# Altium PCB Drvenkar_Dario.PcbDoc
Units mm, origin at the board's own origin, x right, y up, seen from the top; angles counter-clockwise.
Board outline 130 x 90 mm, 2 copper layers (Top Layer, Bottom Layer); 49 components, 38 nets, 178 pads, 0 vias.
Unrouted connection lines stored in the file: 5.
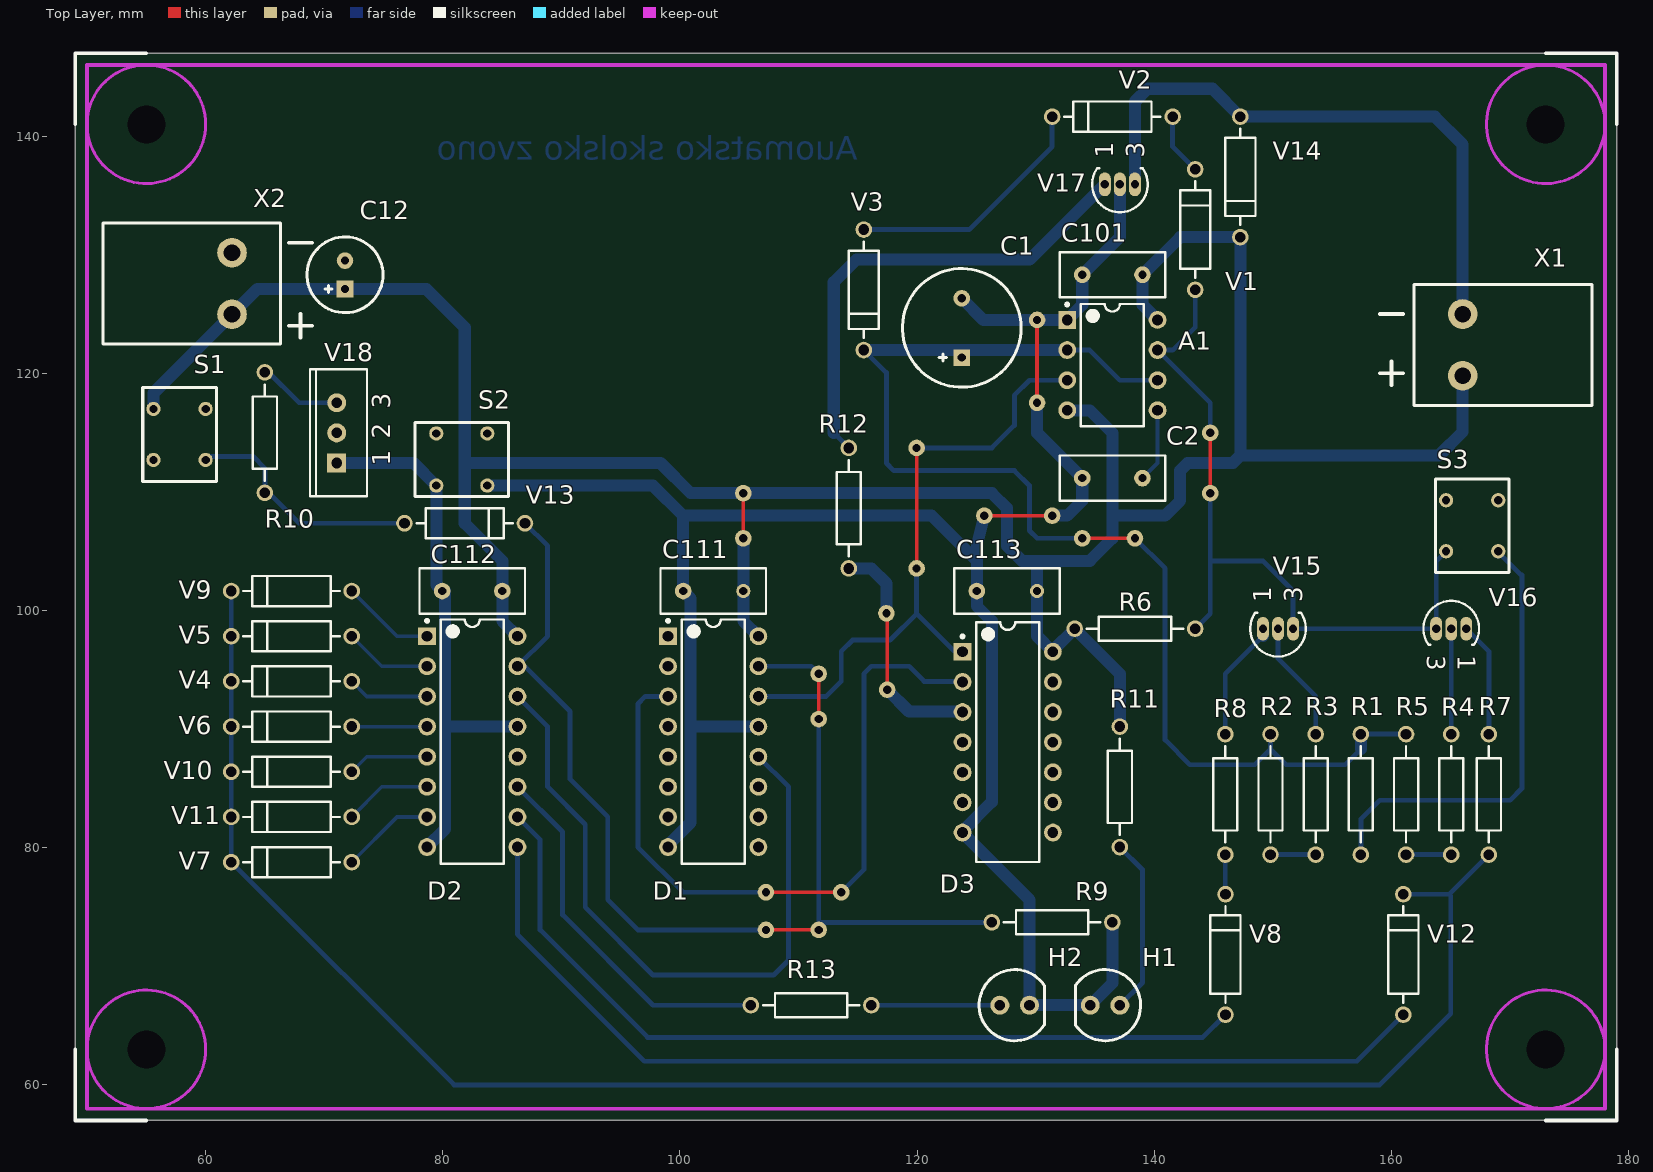
[diagram p0: Top Layer view]
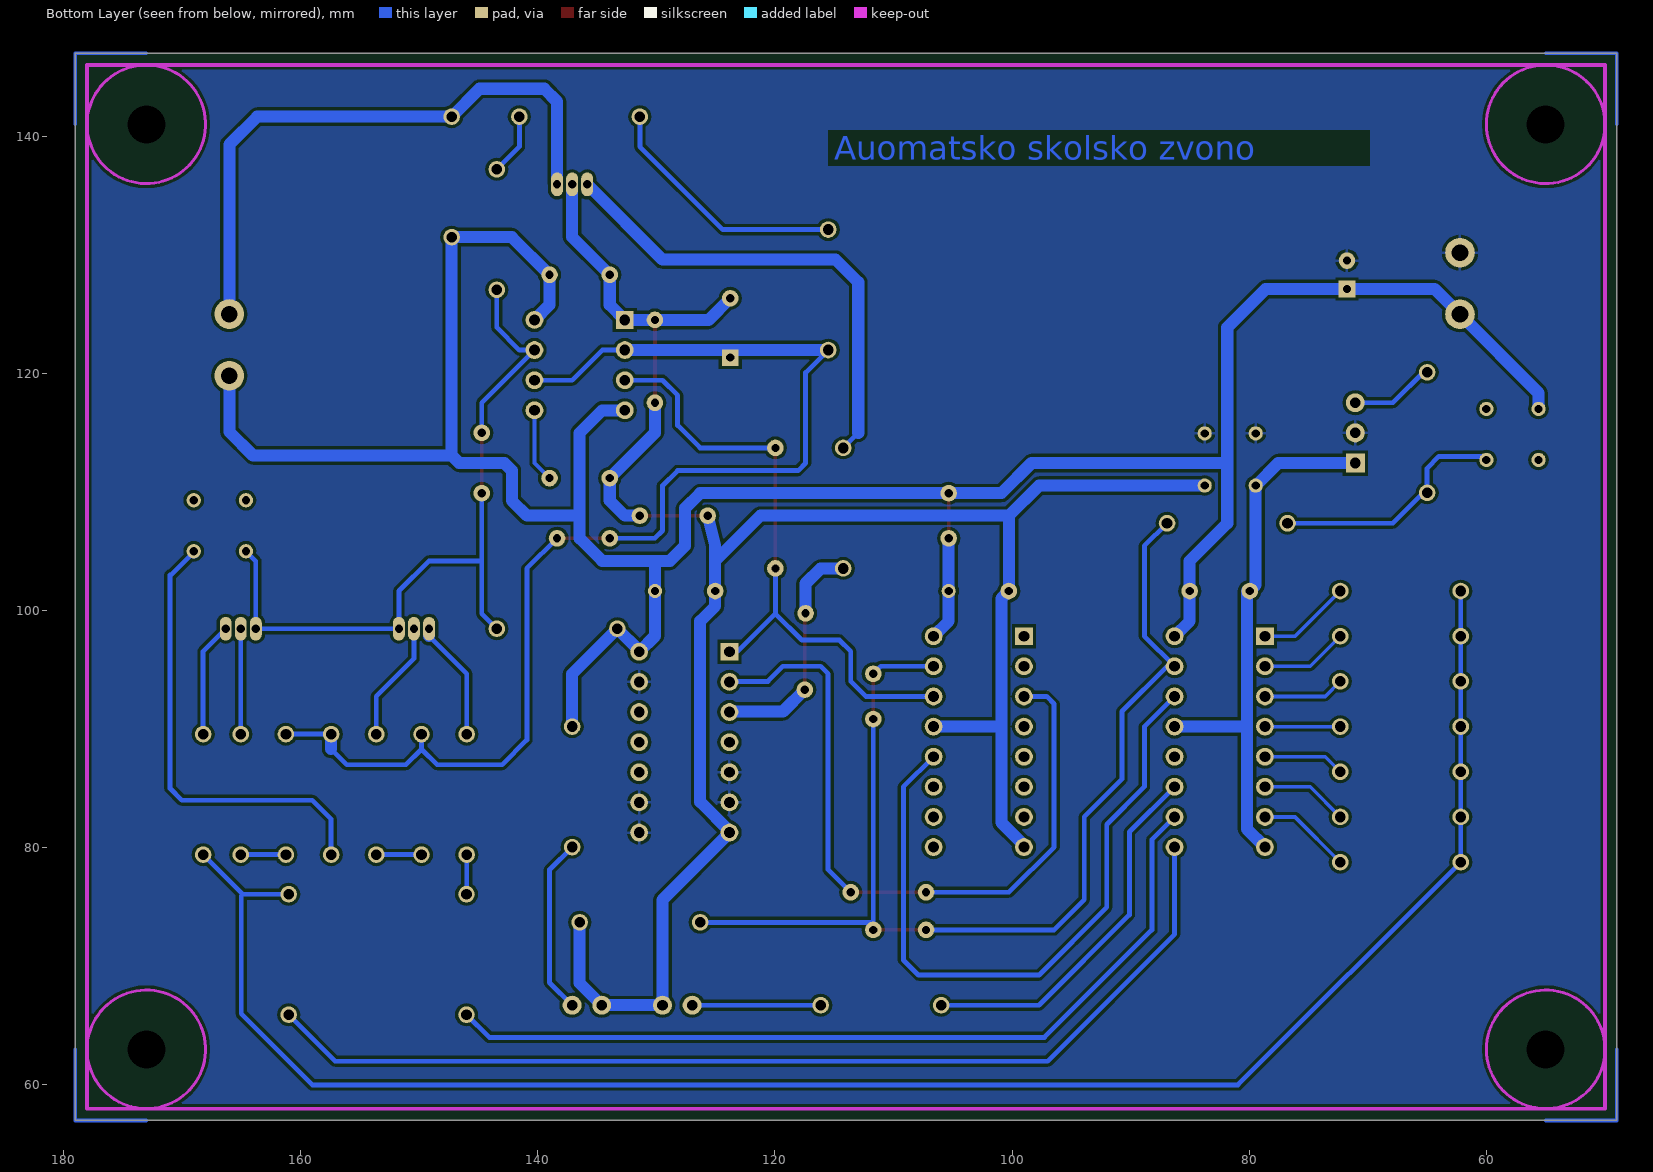
[diagram p1: Bottom Layer view, seen from below]

## Layer stack, top to bottom
Top Solder: solder mask 0.0102, Solder Resist, Dk 3.5
Top Layer: signal copper 0.0356
Dielectric 1: dielectric 0.32, FR-4, Dk 4.8
Bottom Layer: signal copper 0.0356
Bottom Solder: solder mask 0.0102, Solder Resist, Dk 3.5

## Board outline
49,57 49,147 179,147 179,57

## Design rules (kind name [scope] priority, off if disabled: settings)
Clearance [All] p1: gap=0.254
HoleSize [All] p1: absolutevalues=TRUE maxlimit=3.2 minlimit=0.025 maxpercent=80.000 minpercent=20.000
MinimumSolderMaskSliver [All] p1: minsoldermaskwidth=0.051
PolygonConnect [All] p1: connectstyle=Relief reliefconductorwidth=0.254 reliefentries=4 polygonreliefangle="90 Angle" airgapwidth=0.254
RoutingVias [All] p1: holewidth=0.711 width=1.27 viastyle="Through Hole" minholewidth=0.711 minwidth=1.27 maxholewidth=0.711 maxwidth=1.27
SilkToSilkClearance [All] p1: silktosilkclearance=0.051
SilkToSolderMaskClearance [IsPad] p1: minsilkscreentomaskgap=0.051 clearancetoexposedcopper=FALSE
SolderMaskExpansion [All] p1: expansion=0.102
Width [All] p1: maxlimit=1.524 minlimit=0.305 preferedwidth=0.305 minimp=50.000000 maximp=50.000000 favimp=50.000000
25 further rules are at their usual default settings.

## Components (designator, comment, footprint, x,y, rotation, side; value= is the part's Value field where it differs from the comment)
A1 "NE555N" DIP-8 136.46,120.695 r0 top
C1 "1000u/16V" ELKO-10x16 123.76,128.23 r90 top
C2 "0.01u" RAD-0.2#1 136.46,111.17 r0 top
C12 "100u/35V" ELKO-6.3x20 71.755,130.81 r90 top
C101 "100n" RAD-0.2#1 136.46,128.315 r180 top
C111 "100n" RAD-0.2#2 102.805,101.645 r180 top
C112 "100n" RAD-0.2#1 82.485,101.645 r180 top
C113 "100n" RAD-0.2#2 127.57,101.645 r180 top
D1 "CD4017" DIP-16 102.805,88.945 r0 top
D2 "CD4017" DIP-16 82.485,88.945 r0 top
D3 "CD4081" DIP-14 127.635,88.9 r0 top
H1 "LED Zelena" "LED dioda" 136.845,72.22 r180 top
H2 "LED Crvena" "LED dioda" 127.225,61.22 r0 top
R1 "1k" AXIAL-0.4 157.415,84.5 r90 top
R2 "100k" AXIAL-0.4 149.795,84.5 r90 top
R3 "150k" AXIAL-0.4 153.605,84.5 r270 top
R4 "270k" AXIAL-0.4 165.035,84.5 r90 top
R5 "100k" AXIAL-0.4 161.225,84.5 r270 top
R6 "10k" AXIAL-0.4 138.365,98.47 r0 top
R7 "1k" AXIAL-0.4 168.21,84.5 r270 top
R8 "1k" AXIAL-0.4 145.985,84.5 r270 top
R9 "1k" AXIAL-0.4 131.38,73.705 r180 top
R10 "100R" AXIAL-0.4 65,115 r90 top
R11 "1k" AXIAL-0.4 137.095,85.135 r270 top
R12 "1k" AXIAL-0.4 114.235,108.63 r90 top
R13 "1k" AXIAL-0.4 111.06,66.72 r0 top
S1 "Tipkalo" Taster 62.6,119.1 r90 top
S2 "Tipkalo" Taster 77.355,117.535 r180 top
S3 "Tipkalo" Taster 162,102.9 r270 top
V1 "1N4148" DIODE-0.4 143.445,132.125 r90 top
V2 "1N4148" DIODE-0.4 136.46,141.65 r180 top
V3 "1N4148" DIODE-0.4 115.505,127.045 r270 top
V4 "1N4148" DIODE-0.4 67.245,94.025 r180 top
V5 "1N4148" DIODE-0.4 67.245,97.835 r180 top
V6 "1N4148" DIODE-0.4 67.245,90.215 r180 top
V7 "1N4148" DIODE-0.4 67.245,78.785 r180 top
V8 "1N4148" DIODE-0.4 146,71 r90 top
V9 "1N4148" DIODE-0.4 67.245,101.645 r180 top
V10 "1N4148" DIODE-0.4 67.245,86.405 r180 top
V11 "1N4148" DIODE-0.4 67.245,82.595 r180 top
V12 "1N4148" DIODE-0.4 161,71 r90 top
V13 "1N4148" DIODE-0.4 81.85,107.36 r0 top
V14 "1N4007" DIODE-0.4 147.255,136.57 r270 top
V15 "BC547" TO-92 150.43,98.47 r90 top
V16 "BC547" TO-92 165.035,98.47 r270 top
V17 "SL100" TO-92 137.095,135.935 r90 top
V18 "TYN604" TO-220-AB 71.055,114.98 r90 top
X1 "2-pinski konektor" "Redna stezaljka" -516.1,764.8 r90 top
X2 "2-pinski konektor" "Redna stezaljka" 744.33,-514.825 r270 top

## Footprints (in the part's own frame and the unit in brackets; to place one, negate y for a bottom-side part, rotate by r counter-clockwise, add the part's x,y. Pads: shape width x height; smd on the part's side, far side on the other; paste and mask are expansions set on the pad)
AXIAL-0.4 [mm] "Axial Device, Thru-Hole; 2 Leads; 0.4 in Pin Spacing"
  round 1.4 hole 0.9: 1(-5.08,0) 2(5.08,0)
  silkscreen extent -4.06,-1.02 4.06,1.02
DIODE-0.4 [mm] "Diode, Thru-Hole; 2 Leads; 0.4 in Pin Spacing"
  round 1.4 hole 0.9: 1(-5.08,0) 2(5.08,0)
  silkscreen extent -4.06,-1.27 4.06,1.27
DIP-8 [mm] "DIP; 8 Leads; Row Spacing 7.62 mm; Pitch 2.54 mm"
  rect 1.5x1.5 hole 0.9: 1(-3.81,3.81)
  round 1.5 hole 0.9: 2(-3.81,1.27) 3(-3.81,-1.27) 4(-3.81,-3.81) 5(3.81,-3.81) 6(3.81,-1.27) 7(3.81,1.27) 8(3.81,3.81)
  silkscreen extent -3.93,-5.15 2.65,5.23, body extent -3.6,-5.15 3.6,5.15, height 5.08
DIP-14 [mm] "DIP; 14 Leads; Row Spacing 7.62 mm; Pitch 2.54 mm"
  rect 1.5x1.5 hole 0.9: 1(-3.81,7.62)
  round 1.5 hole 0.9: 2(-3.81,5.08) 3(-3.81,2.54) 4(-3.81,0) 5(-3.81,-2.54) 6(-3.81,-5.08) 7(-3.81,-7.62) 8(3.81,-7.62) 9(3.81,-5.08) 10(3.81,-2.54) 11(3.81,0) 12(3.81,2.54) 13(3.81,5.08) 14(3.81,7.62)
  silkscreen extent -3.93,-10.1 2.65,10.1, body extent -3.6,-10.1 3.6,10.1, height 5.08
DIP-16 [mm] "DIP; 16 Leads; Row Spacing 7.62 mm; Pitch 2.54 mm"
  rect 1.5x1.5 hole 0.9: 1(-3.81,8.89)
  round 1.5 hole 0.9: 2(-3.81,6.35) 3(-3.81,3.81) 4(-3.81,1.27) 5(-3.81,-1.27) 6(-3.81,-3.81) 7(-3.81,-6.35) 8(-3.81,-8.89) 9(3.81,-8.89) 10(3.81,-6.35) 11(3.81,-3.81) 12(3.81,-1.27) 13(3.81,1.27) 14(3.81,3.81) 15(3.81,6.35) 16(3.81,8.89)
  silkscreen extent -3.93,-10.3 2.65,10.31, body extent -3.6,-10.28 3.6,10.28, height 5.08
ELKO-6.3x20 [mm]
  rect 1.4x1.4 hole 0.7: 1(-3.7,0)
  round 1.4 hole 0.7: 2(-1.3,0)
  silkscreen extent -5.7,-3.2 0.7,3.2
ELKO-10x16 [mm]
  rect 1.4x1.4 hole 0.7: 1(-6.9,0)
  round 1.4 hole 0.7: 2(-1.9,0)
  silkscreen extent -9.4,-5 0.6,5
"LED dioda" [mm]
  round 1.6 hole 0.9: 1(-0.25,5.5) 2(2.25,5.5)
  silkscreen extent -2,2.5 3.5,8.5
RAD-0.2#1 [mm] "Radial Cap, Thru-Hole; 2 Leads; 0.2 in Pin Spacing"
  round 1.4 hole 0.7: 1(-2.54,0) 2(2.54,0)
  silkscreen extent -4.44,-1.91 4.44,1.91
RAD-0.2#2 [mm] "Radial Cap, Thru-Hole; 2 Leads; 0.2 in Pin Spacing"
  round 1.2 hole 0.7: 1(-2.54,0)
  round 1.4 hole 0.7: 2(2.54,0)
  silkscreen extent -4.44,-1.91 4.44,1.91
"Redna stezaljka" [mm]
  round 2.5 hole 1.4: 1(-645,-682.1) 2(-639.8,-682.1)
  silkscreen extent -647.5,-693 -637.3,-678
Taster [mm]
  round 1.2 hole 0.7: 1(-6.4,2.6) 1(-2.1,2.6) 2(-6.4,7) 2(-2.1,7)
  silkscreen extent -8.2,1.7 -0.3,7.9
TO-92 [mm] "TO, Flat Index; 3 In-Line, Axial Leads; Body Dia. 4.6mm; Leads 0.41 x 0.39 mm (max)"
  oval 2x1 hole 0.7: 1(0,1.27) 2(0,0) 3(0,-1.27)
  silkscreen extent -2.34,-2.34 1.35,2.34
TO-220-AB [mm] "TO, Thru-Hole, Vertical, Heatsink Mounted; 3 In-Line Leads; Pitch 2.54 mm"
  rect 1.6x1.6 hole 0.9: 1(-2.54,0)
  round 1.6 hole 0.9: 2(0,0) 3(2.54,0)
  silkscreen extent -5.35,-2.55 5.35,2.25

## Part data
C1 C12: library part ELKO
C2 C101 C111 C112 C113: library part Kondenzator
H1: library part LED1, "Typical RED GaAs LED"
H2: library part LED2, "Typical RED, GREEN, YELLOW, AMBER GaAs LED"
R1 R2 R3 R4 R5 R6 R7 R8 R9 R10 R11 R12 R13: library part Otpornik
V15 V16 V17: library part Tranzistor
V18: library part Tiristor
X1 X2: library part "Header 2", "Header, 2-Pin"

## Free pads (board coordinates)
  round 1.2 hole 3.2: 0(55,63) 0(55,141) 0(173,63) 0(173,141)
  round 1.4 hole 0.7: 0(105.345,109.9) 0(117.41,99.76) 0(119.95,113.71) 1(105.345,106.09) 1(117.475,93.325) 1(119.95,103.55) 2(125.665,107.995) 3(131.38,107.995) 4(144.715,114.98) 6(144.715,109.9) 7(130.11,117.52) 8(130.11,124.505) 11(133.92,106.09) 12(138.365,106.09) 13(111.695,94.66) 14(111.695,90.85) 17(107.25,76.245) 18(113.6,76.245) 19(107.25,73.07) 20(111.695,73.07)

## Nets (pads, with @x,y where several pads share a name; then routed paths per layer and width w, separated by ;. In a path a pad name is that pad's centre, name@x,y a point inside that pad or via, vN(x,y) a via of type N, cw(c..) or ccw(c..) an arc to the next point about the centre after c; other vN are vias at no path point)
+12V: A1.4 A1.8 C12.1 C101.1 C111.1 C112.1 C113.1 D1.16 D2.16 D3.14 pad.0@105.345,109.9 pad.1@105.345,106.09 R6.1 R11.1 S1.2 V14.2 X1.1 X2.2 | length 239
  Top Layer w0.305: pad.1@105.345,106.09 pad.0@105.345,109.9
  Bottom Layer w1.016: S1.2@55.6,117 55.6,118.345 X2.2 64.365,127.11 C12.1 78.61,127.11 81.85,123.87 81.85,112.44 ; D2.16 85.025,99.105 85.025,104.185 81.85,107.36 81.85,112.44 ; pad.1@105.345,106.09 C111.1 105.345,99.105 D1.16 ; A1.4 134.555,116.885 136.46,114.98 136.46,107.995 ; R11.1 137.095,94.66 R6.1 131.445,96.63 D3.14 130.11,97.855 C113.1 130.11,104.185 ; A1.8 139,125.775 C101.1 142.175,131.49 V14.2 147.255,113.075 ; X1.1 166,115.075 164,113.075 147.255,113.075 ; 81.85,112.44 98.36,112.44 100.9,109.9 105.345,109.9 126.3,109.9 127.57,108.63 127.57,105.455 128.84,104.185 130.11,104.185 ; 130.11,104.185 134.555,104.185 136.46,106.09 136.46,107.995 ; 136.46,107.995 140.905,107.995 142.175,109.265 142.175,111.805 142.81,112.44 146.62,112.44 147.255,113.075
GND: C12.2 D3.5 D3.6 D3.8 D3.9 D3.13 S2.1 V18.2 X2.1
NetA1_2: A1.2 A1.6 C1.1 pad.11 pad.12 R1.2 R2.2 R5.1 V3.2 | length 105.4
  Top Layer w0.305: pad.11 pad.12
  Bottom Layer w0.406: V3.2 117.41,120.06 117.41,112.44 118.045,111.805 128.205,111.805 129.475,110.535 129.475,106.725 130.11,106.09 pad.11 ; A1.2 134.555,121.965 137.095,119.425 A1.6 ; pad.12 140.905,103.55 140.905,89.095 143,87 148.485,87 149.795,88.31 ; R2.2 149.795,88.31 ; 157.415,88.31 156.105,87 151.105,87 149.795,88.31 ; R1.2 R5.1
  Bottom Layer w1.016: V3.2 A1.2 ; 157.415,88.31 R1.2
NetA1_3: A1.3 D1.14 D3.1 pad.0@119.95,113.71 pad.1@119.95,103.55 | length 52.7
  Top Layer w0.305: pad.1@119.95,103.55 pad.0@119.95,113.71
  Bottom Layer w0.406: D1.14 112.33,92.755 113.6,94.025 113.6,96.565 114.552,97.517 117.727,97.517 119.95,99.74 ; pad.1@119.95,103.55 119.95,99.74 ; pad.0@119.95,113.71 126.3,113.71 128.205,115.615 128.205,118.155 129.475,119.425 A1.3 ; D3.1@123.125,96.565 119.95,99.74
NetA1_5: A1.5 C2.2 | length 6.2
  Bottom Layer w0.305: C2.2 140.27,112.44 A1.5
NetA1_7: A1.7 pad.4 pad.6 R6.2 S3.1 V1.1 V15.3 V16.3 | length 63.2
  Top Layer w0.305: pad.6 pad.4
  Bottom Layer w0.406: R6.2 144.715,99.74 144.715,104.185 ; V1.1 143.445,123.87 141.54,121.965 A1.7 144.715,117.52 pad.4 ; pad.6 144.715,104.185 ; S3.1@164.6,105 163.765,104.165 V16.3 V15.3 151.7,101.645 149.16,104.185 144.715,104.185
NetD1_3: D1.3 D3.2 pad.17 pad.18 | length 61.8
  Top Layer w0.305: pad.17 pad.18
  Bottom Layer w0.406: D1.3 97.09,92.755 96.455,92.12 96.455,80.055 100.265,76.245 pad.17 ; pad.18 115.505,78.15 115.505,94.66 116.14,95.295 119.315,95.295 120.585,94.025 D3.2@123.76,94.025
NetD1_12: D1.12 D2.14 | length 58.4
  Bottom Layer w0.406: D2.14 88.835,90.215 88.835,85.135 92.01,81.96 92.01,74.975 97.725,69.26 107.885,69.26 109.155,70.53 109.155,85.135 D1.12
NetD1_15: D1.15 D2.15 pad.13 pad.14 pad.19 pad.20 R9.2 V13.2 | length 96.9
  Top Layer w0.305: pad.19 pad.20 ; pad.14 pad.13
  Bottom Layer w0.406: D2.15 88.835,97.835 88.835,105.455 V13.2 ; D2.15@86.93,95.295 90.74,91.485 90.74,85.77 93.915,82.595 93.915,75.61 96.455,73.07 pad.19 ; D1.15 111.06,95.295 pad.13 ; pad.20 pad.20@111.695,73.705 ; pad.14 pad.20@111.695,73.705 ; R9.2 pad.20@111.695,73.705
NetD2_1: D2.1 V9.1 | length 7.9
  Bottom Layer w0.305: V9.1 76.135,97.835 D2.1
NetD2_2: D2.2 V5.1 | length 7.4
  Bottom Layer w0.305: V5.1 74.865,95.295 D2.2
NetD2_3: D2.3 V4.1 | length 6.9
  Bottom Layer w0.305: V4.1 73.595,92.755 D2.3
NetD2_4: D2.4 V6.1 | length 6.3
  Bottom Layer w0.305: V6.1 D2.4
NetD2_5: D2.5 V10.1 | length 6.9
  Bottom Layer w0.305: V10.1 73.595,87.675 D2.5
NetD2_6: D2.6 V11.1 | length 7.4
  Bottom Layer w0.305: V11.1 74.865,85.135 D2.6
NetD2_7: D2.7 V7.1 | length 7.9
  Bottom Layer w0.305: V7.1 76.135,82.595 D2.7
NetD2_9: D2.9 V12.1 | length 88.1
  Bottom Layer w0.406: D2.9 86.295,72.705 97,62 157.08,62 V12.1
NetD2_10: D2.10 V8.1 | length 72.7
  Bottom Layer w0.406: D2.10 88.2,80.69 88.2,73.07 97.27,64 144.08,64 V8.1
NetD2_11: D2.11 R13.1 | length 31.4
  Bottom Layer w0.406: D2.11 90.105,81.325 90.105,74.34 97.725,66.72 R13.1
NetD3_3: D3.3 pad.0@117.41,99.76 pad.1@117.475,93.325 R12.1 | length 19.6
  Top Layer w0.305: pad.1@117.475,93.325 pad.0@117.475,99.695
  Bottom Layer w1.016: R12.1 116.14,103.55 117.41,102.28 pad.0@117.41,99.76 ; pad.1@117.475,93.325 119.315,91.485 D3.3@123.76,91.485
NetH1_1: H1.1 R11.2 | length 14.9
  Bottom Layer w0.406: H1.1 139,68.625 139,78.15 R11.2
NetH2_1: H2.1 R13.2 | length 10.8
  Bottom Layer w0.406: R13.2 H2.1
NetR1_1: R1.1 S3.2 | length 38.5
  Bottom Layer w0.406: R1.1 157.415,82.415 159,84 170,84 171,85 171,103 170.9,103 S3.2@169,104.9
  Bottom Layer w1.016: S3.2@169,104.9 S3.2@169,105
NetR2_1: R2.1 R3.2 | length 3.8
  Bottom Layer w0.406: R2.1 R3.2
NetR3_1: R3.1 V15.2 | length 10.2
  Bottom Layer w0.406: V15.2 150.43,95.93 153.605,92.755 R3.1
NetR4_1: R4.1 R5.2 | length 3.8
  Bottom Layer w0.406: R5.2 R4.1
NetR4_2: R4.2 V16.2 | length 8.9
  Bottom Layer w0.406: R4.2 V16.2
NetR7_1: R7.1 V16.1 | length 9.7
  Bottom Layer w0.406: V16.1 168.21,96.565 R7.1
NetR7_2: R7.2 V4.2 V5.2 V6.2 V7.2 V9.2 V10.2 V11.2 V12.2 | length 154.7
  Bottom Layer w0.406: V9.2 V5.2 V4.2 V6.2 V10.2 V11.2 V7.2 80.95,60 159,60 165,66 165,75.95 164.87,76.08 ; V12.2 164.87,76.08 ; R7.2 164.87,76.08
NetR8_1: R8.1 V15.1 | length 10.2
  Bottom Layer w0.406: R8.1 145.985,94.66 V15.1@149.16,97.835
  Bottom Layer w1.016: V15.1@149.16,97.835 V15.1
NetR8_2: R8.2 V8.2 | length 3.3
  Bottom Layer w0.406: V8.2@145.985,76.095 R8.2
  Bottom Layer w1.016: V8.2@145.985,76.095 V8.2
NetR10_1: R10.1 S1.1 V13.1 | length 20.4
  Bottom Layer w0.406: S1.1@60,112.7 60.3,113 64,113 65,112 R10.1 65.32,109.92 67.88,107.36 V13.1
NetR10_2: R10.2 V18.3 | length 7
  Bottom Layer w0.406: R10.2@65.16,120.24 67.88,117.52 V18.3
NetR12_2: R12.2 V17.1 | length 40.8
  Bottom Layer w0.406: 112.965,114.98 R12.2
  Bottom Layer w1.016: 112.965,114.98 112.965,127.68 114.87,129.585 129.475,129.585 V17.1
NetV1_2: V1.2 V2.1 | length 5.2
  Bottom Layer w0.406: V2.1 141.54,139.11 V1.2
NetV2_2: V2.2 V3.1 | length 21.3
  Bottom Layer w0.406: V3.1 124.395,132.125 131.38,139.11 V2.2
NetV14_1: V14.1 V17.3 X1.2 | length 51.3
  Bottom Layer w1.016: V17.3 138.365,142.92 139.445,144 144.905,144 V14.1 163.65,141.65 166,139.3 X1.2
NULA: A1.1 C1.2 C2.1 C101.2 C111.2 C112.2 C113.2 D1.8 D1.13 D2.8 D2.13 D3.7 H1.2 H2.2 pad.2 pad.3 pad.7 pad.8 R9.1 S2.2 V17.2 V18.1 | length 231.1
  Top Layer w0.305: pad.2 pad.3 ; pad.7 pad.8
  Bottom Layer w1.016: V18.1 77.55,112.44 79.455,110.535 79.455,102.135 C112.2 ; D2.8 80.187,81.567 C112.2@80.187,101.645 ; 80.822,90.215 D2.13 ; S2.2@83.755,110.535 97.725,110.535 100.265,107.995 ; D1.8@98.995,80.215 100.9,82.12 100.9,90.215 ; D1.13 100.9,90.215 ; C1.2 125.585,124.505 pad.8 A1.1 133.92,125.775 C101.2 137.095,131.49 V17.2 ; pad.2 125.03,105.455 125.03,104.185 ; pad.7 130.11,114.98 C2.1 133.92,109.265 132.65,107.995 pad.3 ; R9.1 136.46,68.585 H1.2 H2.2 129.475,75.61 123.76,81.325 126.3,83.865 126.3,99.105 125.03,100.375 C113.2 125.03,104.185 ; 100.265,107.995 C111.2 100.9,101.01 100.9,90.215 ; 100.265,107.995 121.22,107.995 125.03,104.185
pads on no net: D1.1 D1.2 D1.4 D1.5 D1.6 D1.7 D1.9 D1.10 D1.11 D2.12 D3.4 D3.10 D3.11 D3.12
copper on no net: | length 48
  Bottom Layer w0.305: 49,63 49,57 55,57 ; 49,141 49,147 55,147 ; 173,57 179,57 179,63 ; 173,147 179,147 179,141

## Polygon pours and split planes (outlines as drawn)
GND on Bottom Layer "Top Layer-No Net" (solid, remove dead copper, pour order 4): 36,51 36,146 191,146 191,51

## Keep-outs
Keep-Out Layer:
  circle w0.254: c173,141 r5
  circle w0.254: c55,141 r5
  circle w0.254: c55,63 r5
  circle w0.254: c173,63 r5
  lines w0.305: 50,58 178,58 178,146 50,146 50,58

## Other copper
Bottom Layer:
  text "Auomatsko skolsko zvono" at 115,138 h2

## Silkscreen, mask and mechanical layers (free items; w line width, h text height)
Top Overlay:
  lines w0.305: 49,63 49,57 55,57 ; 49,141 49,147 55,147 ; 67,124 69,124 ; 67,131 69,131 ; 68,123 68,125 ; 159,120 161,120 ; 159,125 161,125 ; 160,119 160,121 ; 173,57 179,57 179,63 ; 173,147 179,147 179,141
Mechanical 1:
  the board outline again, w0.305
Drill Drawing:
  lines w0.254: 71.871,24.887 72.188,24.887 72.188,24.57 72.823,24.57 72.823,24.887 73.141,24.887 73.141,25.522 72.823,25.522 72.823,25.84 72.188,25.84 72.188,25.522 71.871,25.522 71.871,24.887 ; 71.871,29.65 73.141,29.65 72.506,28.38 71.871,29.65 ; 71.871,32.507 72.188,32.507 72.506,32.19 72.823,32.507 73.141,32.507 72.823,32.825 73.141,33.142 72.823,33.142 72.506,33.46 72.188,33.142 71.871,33.142 72.188,32.825 71.871,32.507 ; 71.871,36.635 72.506,36 73.141,36.635 72.506,37.27 71.871,36.635 ; 72.125,32.634 72.315,32.634 72.506,32.444 72.696,32.634 72.887,32.634 72.696,32.825 72.887,33.015 72.696,33.015 72.506,33.206 72.315,33.015 72.125,33.015 72.315,32.825 72.125,32.634
  lines w0.381: 70.14,23.427 168.666,23.427 ; 70.14,38.667 168.666,38.667 ; 84.133,19.617 84.133,42.477 ; 101.857,19.617 101.857,42.477 ; 136.035,19.617 136.035,42.477 ; 148.885,19.617 148.885,42.477 ; 70.14,19.617 168.666,19.617 168.666,42.477 70.14,42.477 70.14,19.617
  text "Symbol" at 72.426,39.81 h1.83
  text "Hit Count" at 85.276,39.81 h1.83
  text "Finished Hole Size" at 103,39.81 h1.83
  text "Plated" at 137.178,39.81 h1.83
  text "Hole Type" at 150.028,39.81 h1.83
  text "4" at 85.276,36 h1.52
  text "1,400mm" at 103,36 h1.52
  text "PTH" at 137.178,36 h1.52
  text "Round" at 150.028,36 h1.52
  text "4" at 85.276,32.19 h1.52
  text "3,200mm" at 103,32.19 h1.52
  text "PTH" at 137.178,32.19 h1.52
  text "Round" at 150.028,32.19 h1.52
  text "55" at 85.276,28.38 h1.52
  text "0,700mm" at 103,28.38 h1.52
  text "PTH" at 137.178,28.38 h1.52
  text "Round" at 150.028,28.38 h1.52
  text "115" at 85.276,24.57 h1.52
  text "0,900mm" at 103,24.57 h1.52
  text "PTH" at 137.178,24.57 h1.52
  text "Round" at 150.028,24.57 h1.52
  text "178 Total" at 85.276,20.76 h1.52

## Dimensions
179,57 to 179,147 on Mechanical 2
49,57 to 179,57 on Mechanical 2

## Text inside footprints (layer, text, board x,y; h text height)
V15: Top Overlay "3" at 152.465,100.694 h1.5 r90; Top Overlay "1" at 149.87,100.694 h1.5 r90
V16: Top Overlay "3" at 163,96.246 h1.5 r270; Top Overlay "1" at 165.595,96.246 h1.5 r270
V17: Top Overlay "3" at 139.13,138.159 h1.5 r90; Top Overlay "1" at 136.535,138.159 h1.5 r90
V18: Top Overlay "1" at 75.58,112.19 h1.5 r90; Top Overlay "2" at 75.58,114.48 h1.5 r90; Top Overlay "3" at 75.58,117.02 h1.5 r90